# Altium PCB 10cm-chip-cal-board-1point2in.PcbDoc
Units mm, origin at the board's own origin, x right, y up, seen from the top; angles counter-clockwise.
Board outline 37 x 16 mm, 4 copper layers (Top Layer, Mid-Layer 1, Mid-Layer 2, Bottom Layer), stack 1.105 mm thick; 2 components, 1 nets, 10 pads, 148 vias.
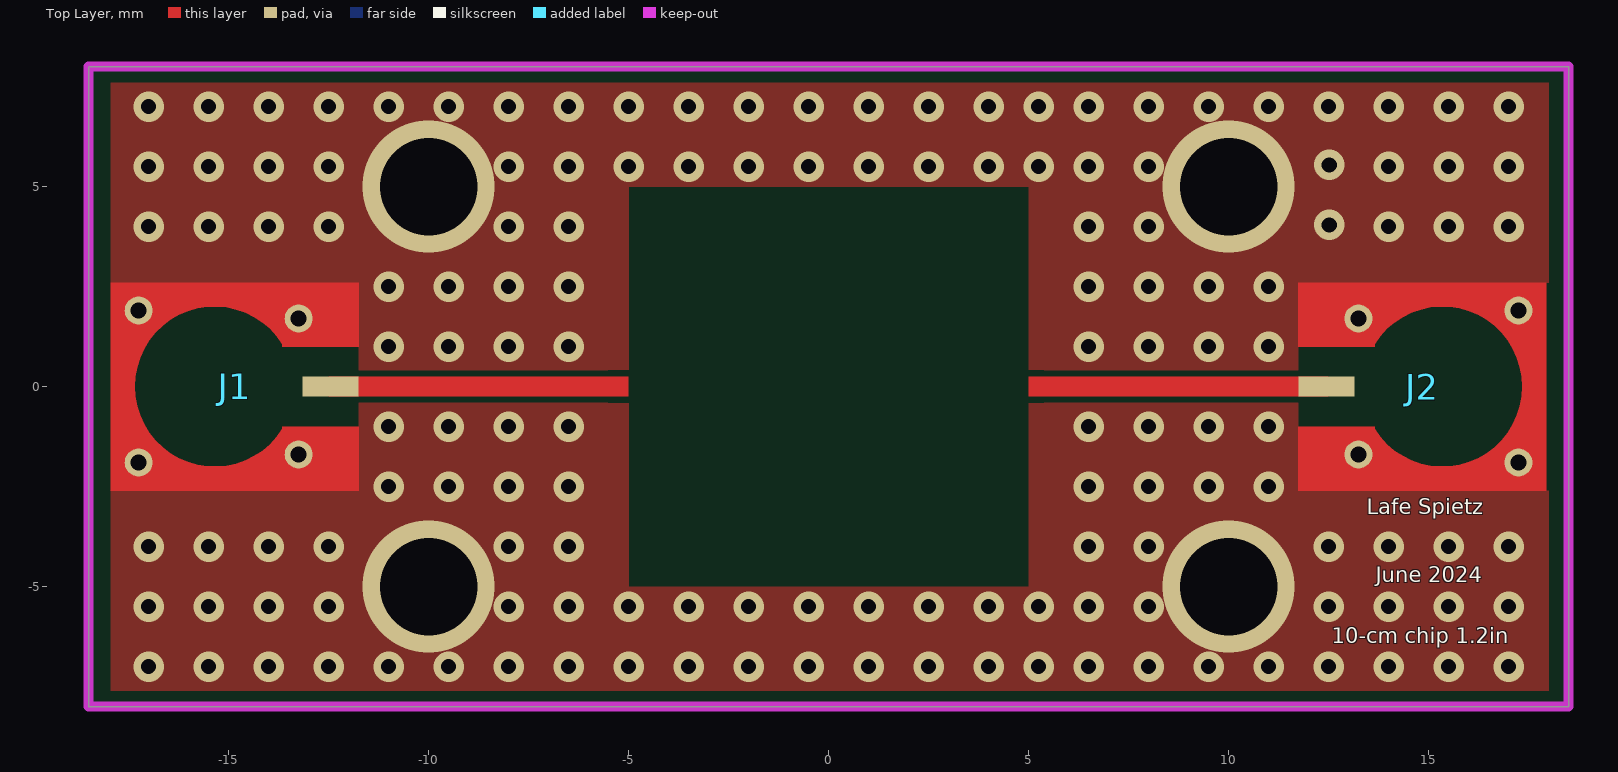
[diagram p0: Top Layer view]
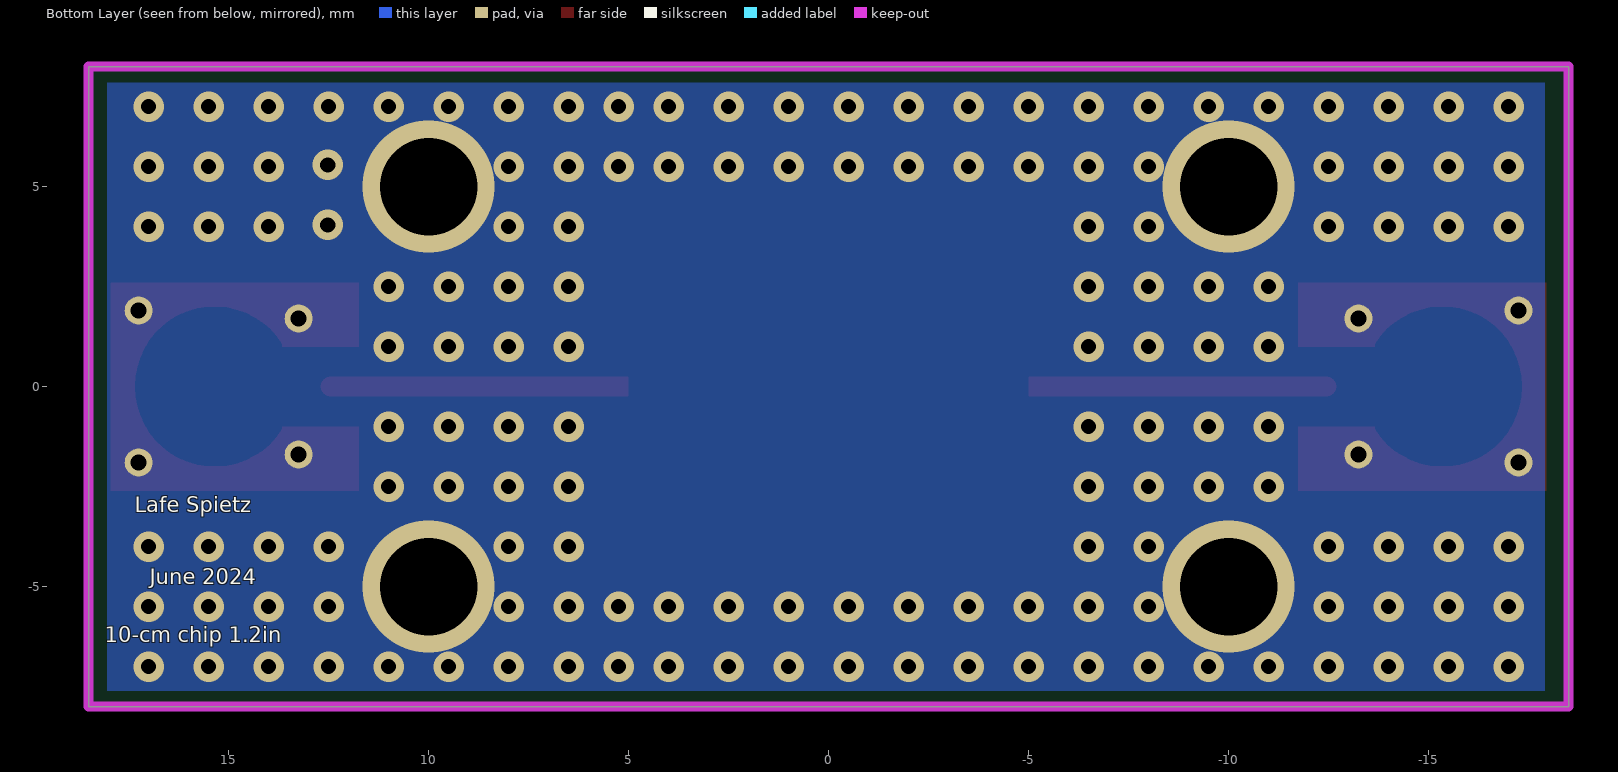
[diagram p1: Bottom Layer view, seen from below]
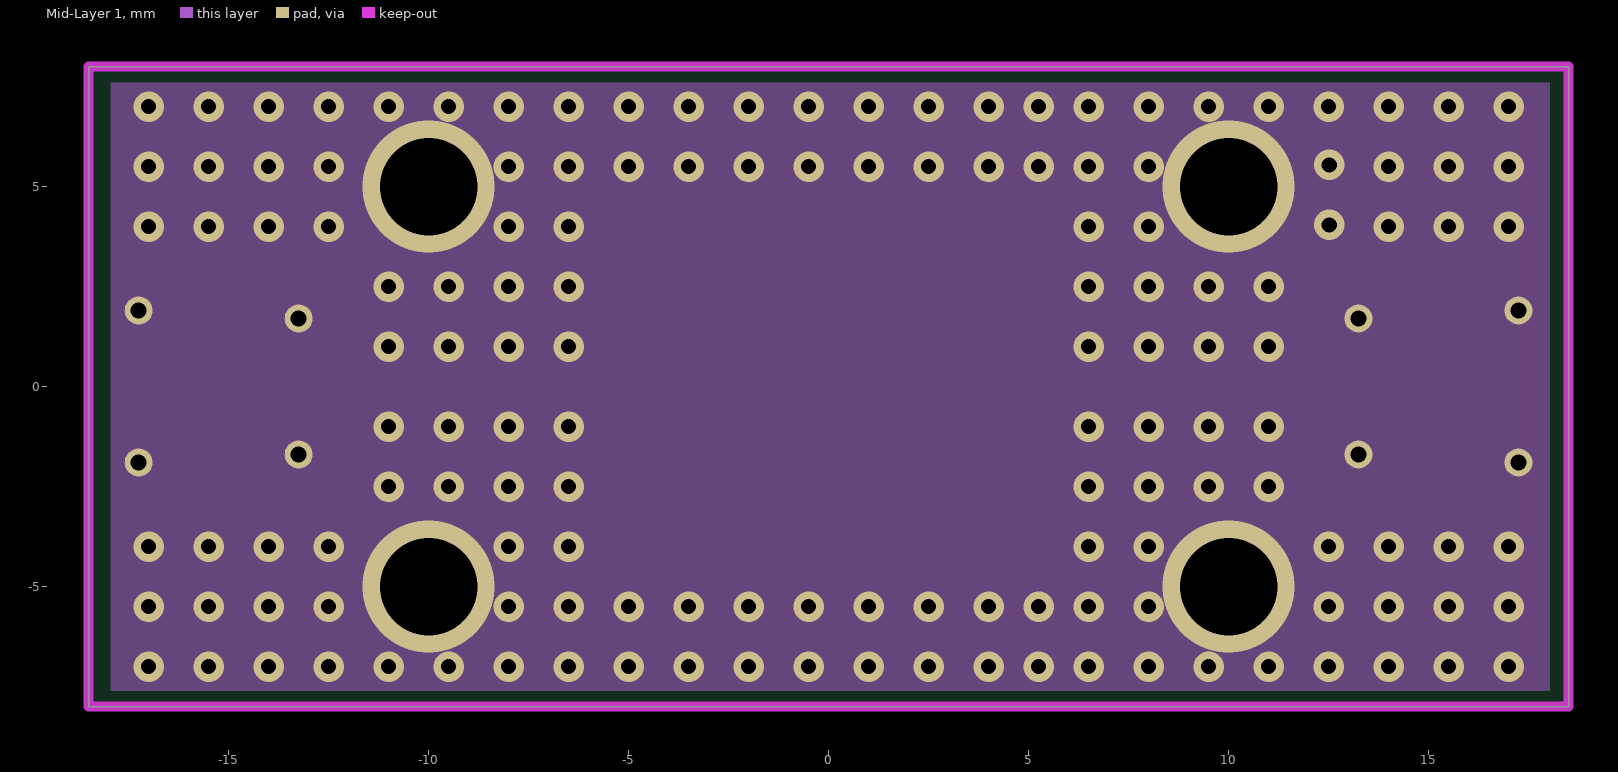
[diagram p2: Mid-Layer 1]
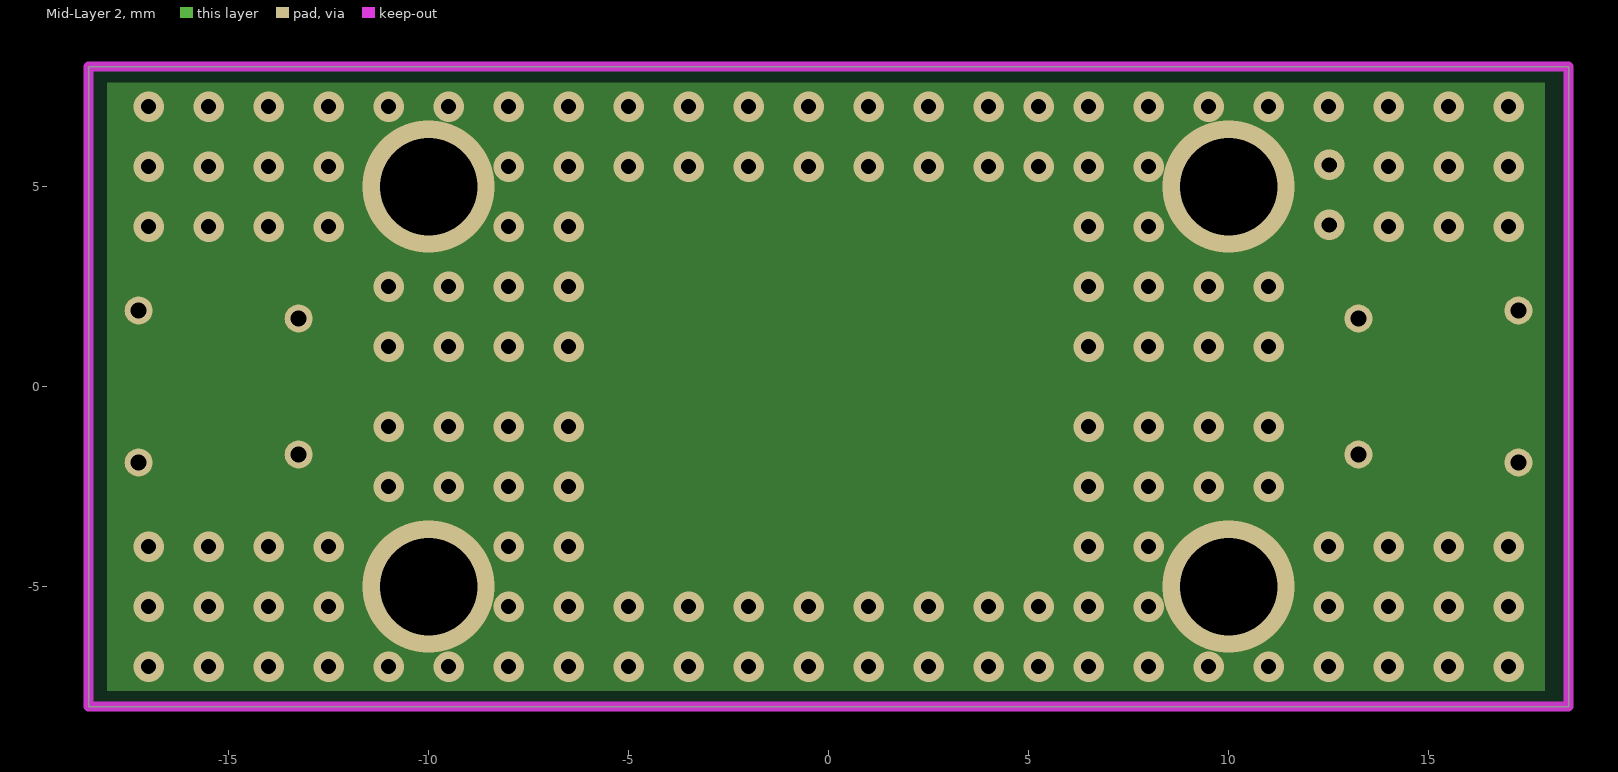
[diagram p3: Mid-Layer 2]

## Layer stack, top to bottom
Top Solder: solder mask 0.0254, SM-001, Dk 4
Top Layer: signal copper 0.035
Core1: dielectric 0.254, RO4350B, Dk 3.48
Mid-Layer 1: signal copper 0.035
Dielectric 1: prepreg 0.1778, PR7628, Dk 4.24
Dielectric 2: prepreg 0.1016, PR2116, Dk 4.17
Dielectric 3: prepreg 0.1778, PR7628, Dk 4.24
Mid-Layer 2: signal copper 0.035
Core2: dielectric 0.254, RO-4350B, Dk 3.48
Bottom Layer: signal copper 0.035
Bottom Solder: solder mask 0.0254, SM-001, Dk 4

## Board outline
-18.5,-8 -18.5,8 18.5,8 18.5,-8

## Design rules (kind name [scope] priority, off if disabled: settings)
Clearance [All] p1: gap=0.254 ignorepadtopadclearanceinfootprint=FALSE except(0: Track-Fill Track-Region Poly-Poly Poly-Region Poly-Hole; 0.095: SMDPad-Region Region-Region; 0.1: Track-Track Track-SMDPad SMDPad-Poly Via-Poly; 0.152: Arc-Poly Track-Poly Fill-Poly; 0.203: Arc-SMDPad; 0.229: SMDPad-SMDPad)
PolygonConnect [All] p1: connectstyle=Direct reliefconductorwidth=0.254 reliefentries=4 polygonreliefangle="90 Angle" airgapwidth=0.254
RoutingVias [All] p1: holewidth=0.381 width=0.635 viastyle="Through Hole" minholewidth=0.127 minwidth=0.254 maxholewidth=0.711 maxwidth=1.27
SolderMaskExpansion [All] p1: expansion=0.102 istentingtop=FALSE
Width [All] p1 off: maxlimit=0.55 minlimit=0.1 preferedwidth=0.254 toplayer_prefwidth=0.1 midlayer1_minwidth=0.254 midlayer1_maxwidth=0.254 midlayer2_minwidth=0.254 midlayer2_maxwidth=0.254 bottomlayer_minwidth=0.254 bottomlayer_maxwidth=0.254 minimp=50.000000 maximp=50.000000 favimp=50.000000
Width cpw-Z-1 [All] p2 off: maxlimit=0.5 minlimit=0.174 preferedwidth=0.254 toplayer_minwidth=0.323 toplayer_prefwidth=0.406 impedanceprofiledriven=TRUE minimp=50.000000 maximp=50.000000 favimp=50.000000
30 further rules are at their usual default settings.

## Components (designator, comment, footprint, x,y, rotation, side; value= is the part's Value field where it differs from the comment)
J1 "SMP-straight-19S141-40ML5" rosenberger-19S141-40ML5 -15.347,0 r90 top
J2 "SMP-straight-19S141-40ML5" rosenberger-19S141-40ML5 15.347,0 r270 top

## Footprints (in the part's own frame and the unit in brackets; to place one, negate y for a bottom-side part, rotate by r counter-clockwise, add the part's x,y. Pads: shape width x height; smd on the part's side, far side on the other; paste and mask are expansions set on the pad)
rosenberger-19S141-40ML5 [mm]
  rect 0.5x1.4 smd: 1(0,-2.9)
  round 0.7 hole 0.4 mask+0: gnd(-1.9,1.9) gnd(-1.7,-2.1) gnd(1.7,-2.1) gnd(1.9,1.9)
  Top Layer region: -2.6,-3.6 -2.6,2.6 2.6,2.6 2.6,-3.6 1,-3.6 1,-1.696 1.06,-1.696 1.759,-0.951 2,0.042 1.718,1.024 0.988,1.739 0,2 -0.988,1.739 -1.718,1.024 -2,0.042 -1.759,-0.951 -1.06,-1.696 -1.06,-1.696 -1,-1.696 -1,-3.6
  body extent -2.5,-3.6 2.5,2.4, height 4.1

## Part data
J1 J2: "SMP Connector Plug, Male Pin 50Ohm Surface Mount Solder", Package=None, Supplier Part Number 1=476-19S201-40ML5, Availability="In Stock", Check_prices=https://www.snapeda.com/parts/853050232/Molex/view-part/?ref=eda, MF=Molex, MP=853050232, Price=None, Purchase-URL=https://pricing.snapeda.com/search/part/853050232/?ref=eda, SnapEDA_Link=https://www.snapeda.com/parts/853050232/Molex/view-part/?ref=snap, Supplier 1=Mouser

## Via types
v1: diameter 0.762, hole 0.381, Top Layer to Bottom Layer, 144 vias
v2: diameter 3.302, hole 2.438, Top Layer to Bottom Layer, 4 vias

## Nets (pads, with @x,y where several pads share a name; then routed paths per layer and width w, separated by ;. In a path a pad name is that pad's centre, name@x,y a point inside that pad or via, vN(x,y) a via of type N, cw(c..) or ccw(c..) an arc to the next point about the centre after c; other vN are vias at no path point)
GND: J1.gnd J2.gnd
  other v1: -17,-7 -15.5,-7 -14,-7 -12.5,-7 -11,-7 -9.5,-7 -8,-7 -6.5,-7 -5,-7 -3.5,-7 -2,-7 -0.5,-7 1,-7 2.5,-7 4,-7 5.25,-7 6.5,-7 8,-7 9.5,-7 11,-7 12.5,-7 14,-7 15.5,-7 17,-7 -17,-5.5 -15.5,-5.5 -14,-5.5 -12.5,-5.5 -8,-5.5 -6.5,-5.5 -5,-5.5 -3.5,-5.5 -2,-5.5 -0.5,-5.5 1,-5.5 2.5,-5.5 4,-5.5 5.25,-5.5 6.5,-5.5 8,-5.5 12.5,-5.5 14,-5.5 15.5,-5.5 17,-5.5 -17,-4 -15.5,-4 -14,-4 -12.5,-4 -8,-4 -6.5,-4 6.5,-4 8,-4 12.5,-4 14,-4 15.5,-4 17,-4 -11,-2.5 -9.5,-2.5 -8,-2.5 -6.5,-2.5 6.5,-2.5 8,-2.5 9.5,-2.5 11,-2.5 -11,-1 -9.5,-1 -8,-1 -6.5,-1 6.5,-1 8,-1 9.5,-1 11,-1 -11,1 -9.5,1 -8,1 -6.5,1 6.5,1 8,1 9.5,1 11,1 -11,2.5 -9.5,2.5 -8,2.5 -6.5,2.5 6.5,2.5 8,2.5 9.5,2.5 11,2.5 -17,4 -15.5,4 -14,4 -12.5,4 -8,4 -6.5,4 6.5,4 8,4 14,4 15.5,4 17,4 12.521,4.039 -17,5.5 -15.5,5.5 -14,5.5 -12.5,5.5 -8,5.5 -6.5,5.5 -5,5.5 -3.5,5.5 -2,5.5 -0.5,5.5 1,5.5 2.5,5.5 4,5.5 5.25,5.5 6.5,5.5 8,5.5 14,5.5 15.5,5.5 17,5.5 12.521,5.539 -17,7 -15.5,7 -14,7 -12.5,7 -11,7 -9.5,7 -8,7 -6.5,7 -5,7 -3.5,7 -2,7 -0.5,7 1,7 2.5,7 4,7 5.25,7 6.5,7 8,7 9.5,7 11,7 12.5,7 14,7 15.5,7 17,7
  other v2: -10,-5 10,-5 -10,5 10,5
pads on no net: J1.1 J2.1
copper on no net: | length 14.1
  Top Layer w0.495: -12.447,0 -5.5,0 ; 5.25,0 12.447,0

## Polygon pours and split planes (outlines as drawn)
GND on Top Layer "NONET_L02_P-001" (solid, pour order 15): -17.947,2.6 -17.947,7.6 18,7.6 18,2.6 5,2.6 5,5 -5,5 -5,2.6
GND on Top Layer "NONET_L02_P-001" (solid, pour order 14): 18,-2.6 18,-7.6 -17.947,-7.6 -17.947,-2.6 -5,-2.6 -5,-5 5,-5 5,-2.6
GND on Top Layer "GND_L01_P000" (solid, pour order 0): -11.747,-2.6 -5,-2.6 -5,2.6 -11.747,2.6
GND on Top Layer "GND_L01_P005" (solid, pour order 5): 5,-2.6 11.747,-2.6 11.747,2.6 5,2.6
GND on Bottom Layer "GND_L04_P003" (solid, pour order 3): -17.907,7.6 18.034,7.6 18.034,-7.6 -17.907,-7.6
GND on Mid-Layer 1 "GND_L02_P012" (solid, pour order 12): -17.941,7.6 18.034,7.6 18.034,-7.6 -17.941,-7.6
GND on Mid-Layer 2 "GND_L03_P013" (solid, pour order 13): -18.034,7.6 17.907,7.6 17.907,-7.6 -18.034,-7.6
no net on Bottom Solder "NONET_L02_P-001" (solid): 18.034,-7.6 18.034,7.6 -18.034,7.6 -18.034,-7.6

## Keep-outs
Keep-Out Layer:
  lines w0.254: -18.5,-8 -18.5,8 18.5,8 18.5,-8 7,-8 -18.5,-8

## Other copper
Top Layer:
  rectangle: 5.003,-0.249 5.379,0.248
  rectangle: -5.5,-0.25 -5,0.25
Multi-Layer:
  pour cut-out: 18.5,-8 18.5,-2.5 12,-2.5 12,-8

## Silkscreen, mask and mechanical layers (free items; w line width, h text height)
Top Overlay:
  text "Lafe Spietz" at 13.452,-3.196 h0.38
  text "June 2024" at 13.677,-4.898 h0.38
  text "10-cm chip 1.2in" at 12.577,-6.421 h0.38
Bottom Overlay:
  text "Lafe Spietz" at 17.348,-3.146 h0.38
  text "June 2024" at 16.973,-4.948 h0.38
  text "10-cm chip 1.2in" at 18.098,-6.396 h0.38
Top Solder:
  rectangle: 11.178,-7.6 12.5,-3
  rectangle: -11.76,-2.057 -10.235,-0.406
  rectangle: -11.43,-7.6 11.43,7.6
  rectangle: -11.76,0.406 -10.235,2.057
  rectangle: -12.551,0.983 -11.237,3.75
  rectangle: -12.551,-3.5 -11.226,-0.974
  rectangle: -17.876,-7.6 -11.101,-3
  rectangle: -17.887,3 -11.237,7.6
  rectangle: 11.178,3 18.028,7.6
  rectangle: 10.408,0.408 11.933,2.059
  rectangle: 10.408,-2.048 11.933,-0.398
  rectangle: 11.178,-3.25 12.573,-1
  rectangle: 11.359,0.982 12.573,3.5